# Altium PCB mach in bo chinh STM32F103.PcbDoc
Units mm, origin at the board's own origin, x right, y up, seen from the top; angles counter-clockwise.
Board outline 60.83 x 91.06 mm, 2 copper layers (Top Layer, Bottom Layer); 42 components, 37 nets, 84 pads, 20 vias.
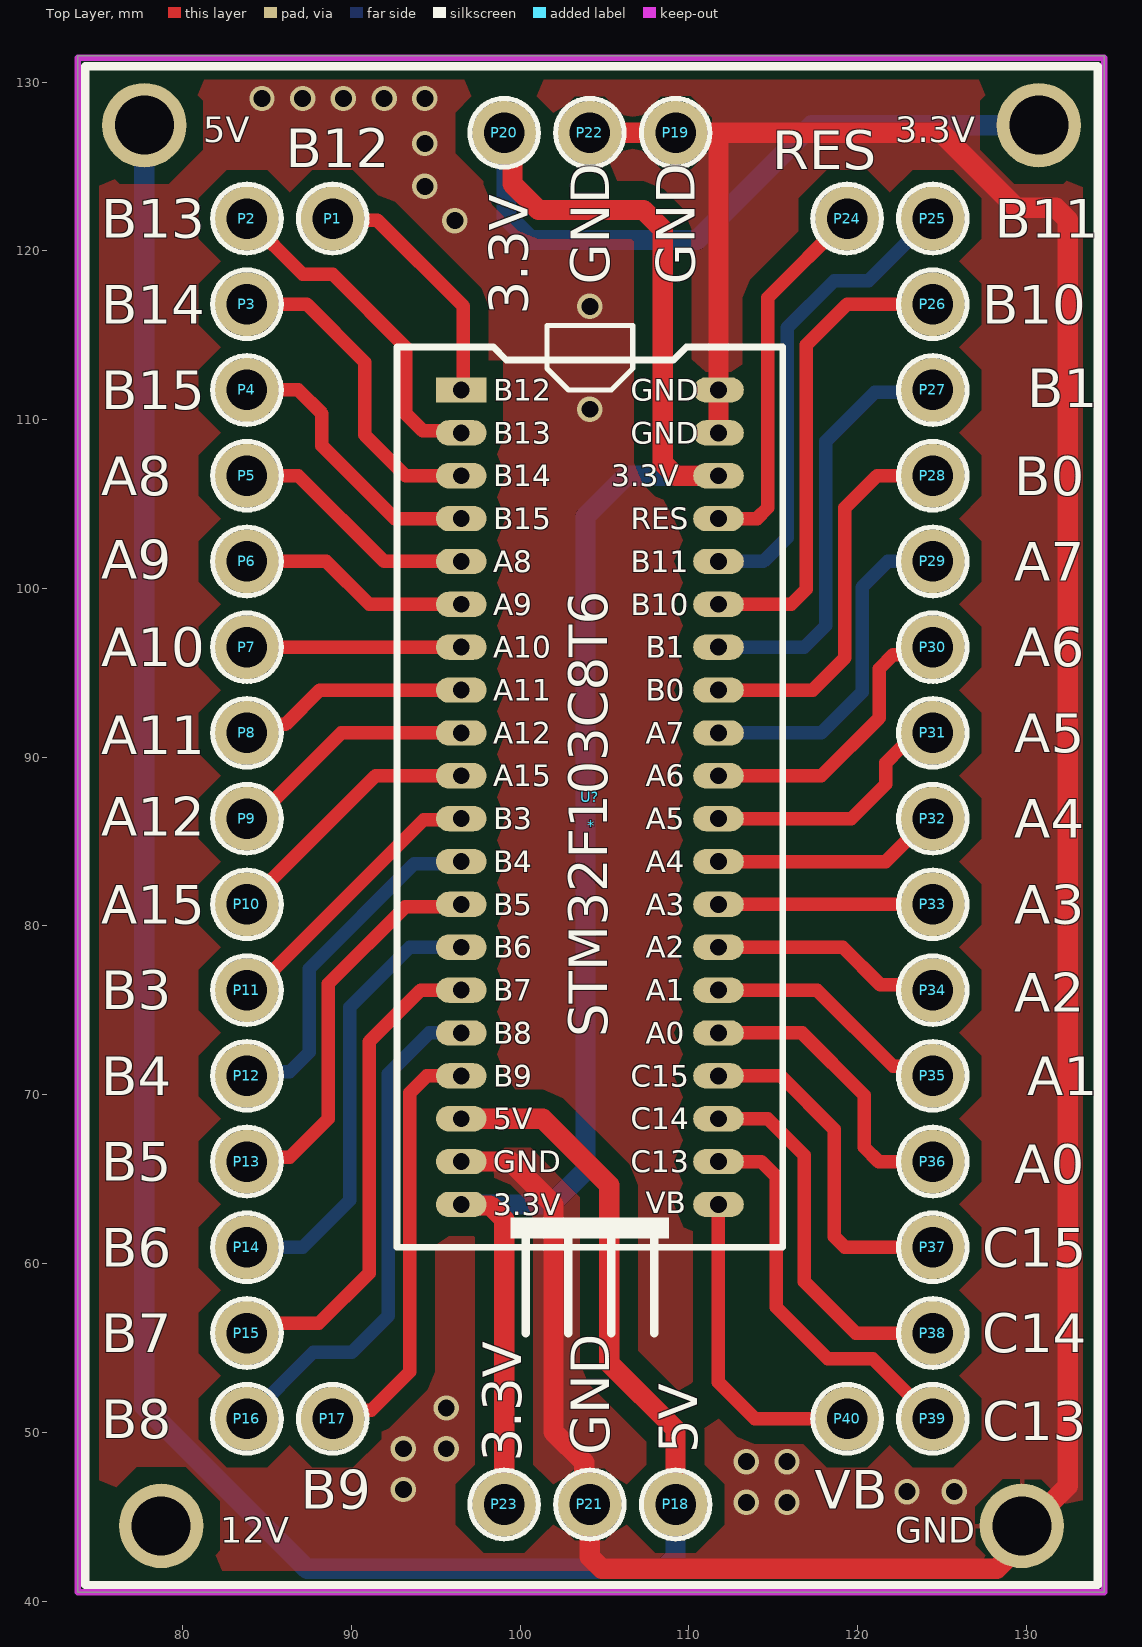
[diagram p0: Top Layer view]
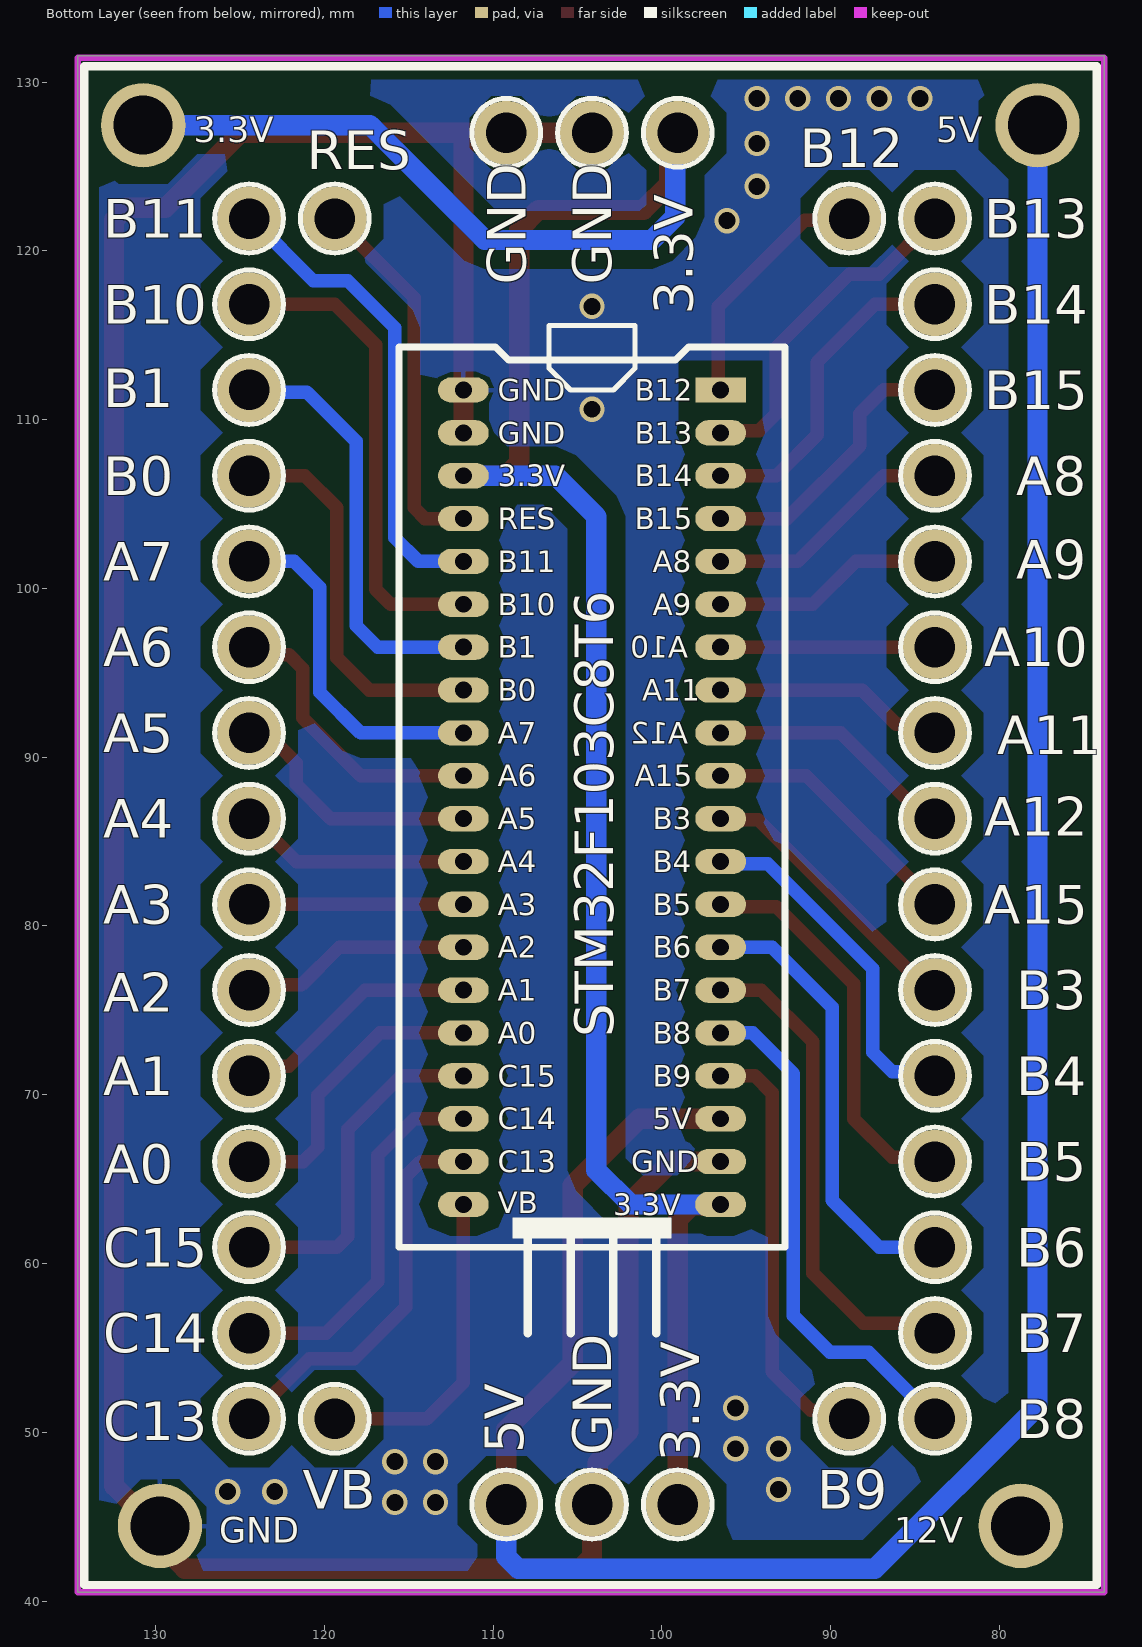
[diagram p1: Bottom Layer view, seen from below]

## Layer stack, top to bottom
Top Solder: solder mask 0.0102, Solder Resist, Dk 3.5
Top Layer: signal copper 0.0356
Dielectric 1: dielectric 0.32, FR-4, Dk 4.8
Bottom Layer: signal copper 0.0356
Bottom Solder: solder mask 0.0102, Solder Resist, Dk 3.5

## Board outline
73.787,40.513 134.62,40.513 134.62,131.572 73.787,131.572

## Design rules (kind name [scope] priority, off if disabled: settings)
Clearance [All] p1: gap=1 ignorepadtopadclearanceinfootprint=FALSE
PolygonConnect [All] p1: connectstyle=Relief reliefconductorwidth=0.254 reliefentries=4 polygonreliefangle="90 Angle" airgapwidth=0.254
RoutingVias [All] p1: holewidth=0.8 width=1.6 viastyle="Through Hole" minholewidth=0.5 minwidth=1 maxholewidth=1 maxwidth=2
SolderMaskExpansion [All] p1: expansion=0.102 istentingtop=FALSE
Width [All] p1: maxlimit=1.2 minlimit=0.3 preferedwidth=0.8
30 further rules are at their usual default settings.

## Components (designator, comment, footprint, x,y, rotation, side; value= is the part's Value field where it differs from the comment)
* "NGUON_1" NGUON_1 105.02,87.485 r0 top
P1 "PIN" PIN1 88.9,121.92 r0 top
P2 "PIN" PIN1 83.82,121.92 r0 top
P3 "PIN" PIN1 83.82,116.84 r0 top
P4 "PIN" PIN1 83.82,111.76 r0 top
P5 "PIN" PIN1 83.82,106.68 r0 top
P6 "PIN" PIN1 83.82,101.6 r0 top
P7 "PIN" PIN1 83.82,96.52 r0 top
P8 "PIN" PIN1 83.82,91.44 r0 top
P9 "PIN" PIN1 83.82,86.36 r0 top
P10 "PIN" PIN1 83.82,81.28 r0 top
P11 "PIN" PIN1 83.82,76.2 r0 top
P12 "PIN" PIN1 83.82,71.12 r0 top
P13 "PIN" PIN1 83.82,66.04 r0 top
P14 "PIN" PIN1 83.82,60.96 r0 top
P15 "PIN" PIN1 83.82,55.88 r0 top
P16 "PIN" PIN1 83.82,50.8 r0 top
P17 "PIN" PIN1 88.9,50.8 r0 top
P18 "PIN" PIN1 109.22,45.72 r0 top
P19 "PIN" PIN1 109.22,127 r0 top
P20 "PIN" PIN1 99.06,127 r0 top
P21 "PIN" PIN1 104.14,45.72 r0 top
P22 "PIN" PIN1 104.14,127 r0 top
P23 "PIN" PIN1 99.06,45.72 r0 top
P24 "PIN" PIN1 119.38,121.92 r0 top
P25 "PIN" PIN1 124.46,121.92 r0 top
P26 "PIN" PIN1 124.46,116.84 r0 top
P27 "PIN" PIN1 124.46,111.76 r0 top
P28 "PIN" PIN1 124.46,106.68 r0 top
P29 "PIN" PIN1 124.46,101.6 r0 top
P30 "PIN" PIN1 124.46,96.52 r0 top
P31 "PIN" PIN1 124.46,91.44 r0 top
P32 "PIN" PIN1 124.46,86.36 r0 top
P33 "PIN" PIN1 124.46,81.28 r0 top
P34 "PIN" PIN1 124.46,76.2 r0 top
P35 "PIN" PIN1 124.46,71.12 r0 top
P36 "PIN" PIN1 124.46,66.04 r0 top
P37 "PIN" PIN1 124.46,60.96 r0 top
P38 "PIN" PIN1 124.46,55.88 r0 top
P39 "PIN" PIN1 124.46,50.8 r0 top
P40 "PIN" PIN1 119.38,50.8 r0 top
U? "STM32F103" STM32F103_KC 104.394,89.535 r0 top

## Footprints (in the part's own frame and the unit in brackets; to place one, negate y for a bottom-side part, rotate by r counter-clockwise, add the part's x,y. Pads: shape width x height; smd on the part's side, far side on the other; paste and mask are expansions set on the pad)
NGUON_1 [mm]
  round 5 hole 3.5: 1(-27.28,39.965) 2(25.72,39.965) 3(-26.28,-43.035) 4(24.72,-43.035)
  silkscreen extent -30.78,-46.53 29.22,43.47
PIN1 [mm]
  round 3.8 hole 2.4: 1(0,0)
  silkscreen extent -2.03,-2.03 2.03,2.03
STM32F103_KC [mm]
  rect 3x1.5 hole 1: 1(-7.874,22.225)
  oval 3x1.5 hole 1: 2(-7.874,19.685) 3(-7.874,17.145) 4(-7.874,14.605) 5(-7.874,12.065) 6(-7.874,9.525) 7(-7.874,6.985) 8(-7.874,4.445) 9(-7.874,1.905) 10(-7.874,-0.635) 11(-7.874,-3.175) 12(-7.874,-5.715) 13(-7.874,-8.255) 14(-7.874,-10.795) 15(-7.874,-13.335) 16(-7.874,-15.875) 17(-7.874,-18.415) 18(-7.874,-20.955) 19(-7.874,-23.495) 20(-7.874,-26.035) 21(7.366,-26.035) 22(7.366,-23.495) 23(7.366,-20.955) 24(7.366,-18.415) 25(7.366,-15.875) 26(7.366,-13.335) 27(7.366,-10.795) 28(7.366,-8.255) 29(7.366,-5.715) 30(7.366,-3.175) 31(7.366,-0.635) 32(7.366,1.905) 33(7.366,4.445) 34(7.366,6.985) 35(7.366,9.525) 36(7.366,12.065) 37(7.366,14.605) 38(7.366,17.145) 39(7.366,19.685) 40(7.366,22.225)
  silkscreen extent -11.68,-33.66 11.18,26.04

## Via types
v1: diameter 1.5, hole 1, Top Layer to Bottom Layer, tented both sides, 20 vias

## Nets (pads, with @x,y where several pads share a name; then routed paths per layer and width w, separated by ;. In a path a pad name is that pad's centre, name@x,y a point inside that pad or via, vN(x,y) a via of type N, cw(c..) or ccw(c..) an arc to the next point about the centre after c; other vN are vias at no path point)
3.3V: *.2 P20.1 P23.1 U?.20 U?.38 | length 146.3
  Top Layer w1.2: U?.20 96.577,63.443 98.228,63.443 99.06,62.611 P23.1 ; P20.1 99.557,126.503 99.557,123.963 101.092,122.428 107.315,122.428 108.458,121.285 108.458,107.442 109.22,106.68 U?.38
  Bottom Layer w1.2: U?.20 101.854,63.5 103.886,65.532 103.886,104.267 106.299,106.68 U?.38 ; P20.1 99.204,126.856 99.204,122.03 100.584,120.65 110.49,120.65 117.29,127.45 *.2
5V: *.1 P18.1 U?.18 | length 145.7
  Top Layer w1.2: U?.18 101.346,68.58 105.283,64.643 105.283,54.102 109.22,50.165 P18.1
  Bottom Layer w1.2: *.1 77.74,51.546 87.376,41.91 108.517,41.91 109.22,42.613 P18.1
A0: P36.1 U?.25 | length 17.7
  Top Layer w0.8: U?.25 116.713,73.66 120.396,69.977 120.396,66.89 121.246,66.04 P36.1
A1: P35.1 U?.26 | length 14.8
  Top Layer w0.8: U?.26 117.602,76.2 122.108,71.694 123.886,71.694 P35.1
A2: P34.1 U?.27 | length 13.8
  Top Layer w0.8: U?.27 119.126,78.74 121.36,76.506 124.154,76.506 P34.1
A3: P33.1 U?.28 | length 12.7
  Top Layer w0.8: U?.28 P33.1
A4: P32.1 U?.29 | length 13.8
  Top Layer w0.8: U?.29 121.666,83.82 124.206,86.36 P32.1
A5: P31.1 U?.30 | length 15.5
  Top Layer w0.8: U?.30 119.634,86.36 121.666,88.392 121.666,89.662 122.56,90.556 122.764,90.556 123.648,91.44 P31.1
A6: P30.1 U?.31 | length 17.6
  Top Layer w0.8: U?.31 117.856,88.9 121.285,92.329 121.285,95.25 122.115,96.08 124.02,96.08 P30.1
A7: P29.1 U?.32 | length 20.6
  Bottom Layer w0.8: U?.32 117.856,91.44 120.269,93.853 120.269,100.076 121.793,101.6 P29.1
A8: P5.1 U?.5 | length 14.8
  Top Layer w0.8: P5.1 86.868,106.68 91.948,101.6 U?.5
A9: P6.1 U?.6 | length 13.8
  Top Layer w0.8: P6.1 88.519,101.6 91.059,99.06 U?.6
A10: P7.1 U?.7 | length 12.7
  Top Layer w0.8: P7.1 U?.7
A11: P8.1 U?.8 | length 13.8
  Top Layer w0.8: P8.1 84.323,91.943 86.101,91.943 88.138,93.98 U?.8
A12: P9.1 U?.9 | length 14.8
  Top Layer w0.8: P9.1 84.328,86.36 89.408,91.44 U?.9
A15: P10.1 U?.10 | length 15.9
  Top Layer w0.8: P10.1 91.44,88.9 U?.10
B0: P28.1 U?.33 | length 23.2
  Top Layer w0.8: U?.33 117.348,93.98 119.253,95.885 119.253,104.775 121.158,106.68 P28.1
B1: P27.1 U?.34 | length 25.4
  Bottom Layer w0.8: U?.34 116.84,96.52 118.11,97.79 118.11,108.712 121.031,111.633 124.333,111.633 P27.1
B3: P11.1 U?.11 | length 16.9
  Top Layer w0.8: P11.1 84.201,76.2 94.296,86.295 96.455,86.295 U?.11
B4: P12.1 U?.12 | length 21.5
  Top Layer w0.8: P12.1 P12.1@84.455,71.12 ; U?.12@96.386,83.686 U?.12
  Bottom Layer w0.8: P12.1 84.069,71.369 86.355,71.369 87.503,72.517 87.503,77.47 93.719,83.686 U?.12@96.386,83.686
B5: P13.1 U?.13 | length 23.7
  Top Layer w0.8: P13.1 84.069,66.289 86.355,66.289 88.646,68.58 88.646,76.581 93.211,81.146 96.386,81.146 U?.13
B6: P14.1 U?.14 | length 26.8
  Bottom Layer w0.8: P14.1 87.122,60.96 89.916,63.754 89.916,75.184 93.472,78.74 U?.14
B7: P15.1 U?.15 | length 29.2
  Top Layer w0.8: P15.1 84.394,56.454 88.077,56.454 91.059,59.436 91.059,73.152 94.107,76.2 U?.15
B8: P16.1 U?.16 | length 31.3
  Top Layer w0.8: U?.16@95.77,73.66 U?.16
  Bottom Layer w0.8: P16.1 87.757,54.737 90.043,54.737 92.202,56.896 92.202,71.247 94.614,73.659 96.519,73.659 U?.16
B9: P17.1 U?.17 | length 25.7
  Top Layer w0.8: P17.1 89.403,51.303 91.181,51.303 93.472,53.594 93.472,70.104 94.487,71.119 96.519,71.119 U?.17
B10: P26.1 U?.35 | length 28.5
  Top Layer w0.8: U?.35 116.078,99.06 116.967,99.949 116.967,114.427 119.38,116.84 P26.1
B11: P25.1 U?.36 | length 28.4
  Bottom Layer w0.8: U?.36 114.427,101.6 115.824,102.997 115.824,115.443 118.618,118.237 120.65,118.237 124.333,121.92 P25.1
B12: P1.1 U?.1 | length 14.9
  Top Layer w0.8: P1.1 88.991,121.829 91.531,121.829 96.647,116.713 96.647,111.887 U?.1
B13: P2.1 U?.2 | length 20.3
  Top Layer w0.8: P2.1 87.122,118.618 88.9,118.618 93.218,114.3 93.218,110.363 94.227,109.354 96.386,109.354 U?.2
B14: P3.1 U?.3 | length 19.4
  Top Layer w0.8: P3.1 87.376,116.84 90.805,113.411 90.805,109.093 93.218,106.68 U?.3
B15: P4.1 U?.4 | length 17
  Top Layer w0.8: P4.1 86.868,111.76 88.265,110.363 88.265,108.458 92.583,104.14 U?.4
C13: P39.1 U?.22 | length 23.6
  Top Layer w0.8: U?.22 114.3,66.04 115.189,65.151 115.189,57.404 118.237,54.356 120.904,54.356 P39.1
C14: P38.1 U?.23 | length 22.3
  Top Layer w0.8: U?.23 114.681,68.58 116.84,66.421 116.84,58.928 119.888,55.88 P38.1
C15: P37.1 U?.24 | length 20.6
  Top Layer w0.8: U?.24 115.443,71.12 118.618,67.945 118.618,61.595 119.253,60.96 P37.1
GND: *.4 P19.1 P21.1 P22.1 U?.19 U?.39 U?.40 | length 183.1
  Top Layer w1.2: U?.19 99.441,66.04 101.981,63.5 101.981,50.038 103.803,48.216 103.803,46.057 P21.1 104.14,42.613 104.843,41.91 128.27,41.91 128.27,41.952 129.74,43.422 *.4@129.74,44.713 ; P22.1 P19.1 111.76,127 ; U?.39 U?.40 111.76,127 ; *.4 130.095,44.45 132.461,46.816 132.461,121.852 131.758,122.555 129.413,122.555 124.968,127 111.76,127
  other v1: 113.411,45.847 115.824,45.847 122.936,46.482 125.73,46.482 93.091,46.609 113.411,48.26 115.824,48.26 93.091,49.022 95.631,49.022 95.631,51.435 104.14,110.617 104.14,116.713 96.139,121.793 94.361,123.825 94.361,126.365 84.709,129.032 87.122,129.032 89.535,129.032 91.948,129.032 94.361,129.032
RES: P24.1 U?.37 | length 22.3
  Top Layer w0.8: U?.37 114.046,104.14 114.681,104.775 114.681,117.221 P24.1
VB: P40.1 U?.21 | length 19.1
  Top Layer w0.8: U?.21 111.76,52.959 113.919,50.8 P40.1
pads on no net: *.3

## Polygon pours and split planes (outlines as drawn)
GND on Top Layer "Top Poly" (solid, remove dead copper, pour order 7): 73.787,131.445 134.62,131.445 134.62,40.513 73.787,40.513
GND on Bottom Layer "Bottom Poly" (solid, remove dead copper, pour order 8): 73.787,131.445 134.62,131.445 134.62,40.513 73.787,40.513

## Keep-outs
Keep-Out Layer:
  lines w0.381: 73.787,40.513 73.787,131.445 134.62,131.445 134.62,40.513 73.787,40.513

## Silkscreen, mask and mechanical layers (free items; w line width, h text height)
Top Overlay:
  text "B12" at 86.106,124.968 h2.29
  text "RES" at 114.935,124.841 h2.29
  text "B13" at 75.184,120.777 h2.29
  text "B11" at 128.143,120.777 h2.29
  text "GND" at 105.283,117.983 h2.29 r90
  text "GND" at 110.363,117.983 h2.29 r90
  text "3.3V" at 100.457,116.205 h2.29 r90
  text "B14" at 75.184,115.697 h2.29
  text "B10" at 127.381,115.697 h2.29
  text "B1" at 130.047,110.744 h2.29
  text "B15" at 75.184,110.617 h2.29
  text "A8" at 75.184,105.537 h2.29
  text "B0" at 129.285,105.537 h2.29
  text "A9" at 75.184,100.584 h2.29
  text "A7" at 129.285,100.457 h2.29
  text "A10" at 75.184,95.377 h2.29
  text "A6" at 129.285,95.377 h2.29
  text "A5" at 129.285,90.297 h2.29
  text "A11" at 75.184,90.17 h2.29
  text "A12" at 75.184,85.344 h2.29
  text "A4" at 129.285,85.217 h2.29
  text "A15" at 75.184,80.137 h2.29
  text "A3" at 129.285,80.137 h2.29
  text "B3" at 75.184,75.057 h2.29
  text "A2" at 129.285,74.93 h2.29
  text "STM32F103C8T6" at 105.156,73.406 h2.29 r90
  text "B4" at 75.184,69.977 h2.29
  text "A1" at 130.047,69.977 h2.29
  text "B5" at 75.184,64.897 h2.29
  text "A0" at 129.285,64.77 h2.29
  text "B6" at 75.184,59.817 h2.29
  text "C15" at 127.381,59.817 h2.29
  text "B7" at 75.184,54.737 h2.29
  text "C14" at 127.381,54.737 h2.29
  text "B8" at 75.184,49.657 h2.29
  text "C13" at 127.381,49.53 h2.29
  text "5V" at 110.49,48.768 h2.29 r90
  text "GND" at 105.283,48.641 h2.29 r90
  text "3.3V" at 100.076,48.26 h2.29 r90
  text "B9" at 86.995,45.466 h2.29
  text "VB" at 117.475,45.466 h2.29
Bottom Overlay:
  text "B12" at 91.821,124.968 h2.29
  text "RES" at 121.031,124.841 h2.29
  text "B13" at 80.899,120.777 h2.29
  text "B11" at 133.096,120.777 h2.29
  text "GND" at 102.997,117.983 h2.29 r270
  text "GND" at 108.077,117.983 h2.29 r270
  text "3.3V" at 98.171,116.205 h2.29 r270
  text "B14" at 80.899,115.697 h2.29
  text "B10" at 133.096,115.697 h2.29
  text "B1" at 133.096,110.744 h2.29
  text "B15" at 80.899,110.617 h2.29
  text "A8" at 78.995,105.537 h2.29
  text "B0" at 133.096,105.537 h2.29
  text "A9" at 78.995,100.584 h2.29
  text "A7" at 133.096,100.457 h2.29
  text "A10" at 80.899,95.377 h2.29
  text "A6" at 133.096,95.377 h2.29
  text "A5" at 133.096,90.297 h2.29
  text "A11" at 80.137,90.17 h2.29
  text "A12" at 80.899,85.344 h2.29
  text "A4" at 133.096,85.217 h2.29
  text "A15" at 80.899,80.137 h2.29
  text "A3" at 133.096,80.137 h2.29
  text "B3" at 78.995,75.057 h2.29
  text "A2" at 133.096,74.93 h2.29
  text "STM32F103C8T6" at 102.87,73.406 h2.29 r270
  text "B4" at 78.995,69.977 h2.29
  text "A1" at 133.096,69.977 h2.29
  text "B5" at 78.995,64.897 h2.29
  text "A0" at 133.096,64.77 h2.29
  text "B6" at 78.995,59.817 h2.29
  text "C15" at 133.096,59.817 h2.29
  text "B7" at 78.995,54.737 h2.29
  text "C14" at 133.096,54.737 h2.29
  text "B8" at 78.995,49.657 h2.29
  text "C13" at 133.096,49.53 h2.29
  text "5V" at 108.204,48.768 h2.29 r270
  text "GND" at 102.997,48.641 h2.29 r270
  text "3.3V" at 97.79,48.26 h2.29 r270
  text "B9" at 90.805,45.466 h2.29
  text "VB" at 121.285,45.466 h2.29

## Text inside footprints (layer, text, board x,y; h text height)
*: Bottom Overlay "5V" at 83.74,126.45 h1.52; Bottom Overlay "3.3V" at 127.74,126.45 h1.52; Bottom Overlay "GND" at 126.24,43.45 h1.52; Bottom Overlay "12V" at 86.24,43.45 h1.52; Top Overlay "5V" at 81.24,126.45 h1.52; Top Overlay "3.3V" at 122.24,126.45 h1.52; Top Overlay "GND" at 122.24,43.45 h1.52; Top Overlay "12V" at 82.24,43.45 h1.52
U?: Bottom Overlay "VB" at 109.728,62.992 h1.27; Bottom Overlay "A1" at 109.728,75.565 h1.27; Bottom Overlay "B1" at 109.728,95.885 h1.27; Bottom Overlay "B11" at 109.728,100.965 h1.27; Bottom Overlay "3.3V" at 109.728,106.045 h1.27; Bottom Overlay "GND" at 109.728,108.585 h1.27; Bottom Overlay "B12" at 101.6,111.125 h1.27; Bottom Overlay "B10" at 109.728,98.425 h1.27; Bottom Overlay "A2" at 109.728,78.105 h1.27; Bottom Overlay "A4" at 109.728,83.185 h1.27; Bottom Overlay "A3" at 109.728,80.645 h1.27; Bottom Overlay "C15" at 109.728,70.485 h1.27; Bottom Overlay "A0" at 109.728,73.025 h1.27; Bottom Overlay "RES" at 109.728,103.505 h1.27; Bottom Overlay "GND" at 109.728,111.125 h1.27; Bottom Overlay "A15" at 101.6,88.265 h1.27; Bottom Overlay "B3" at 100.542,85.725 h1.27; Bottom Overlay "B5" at 100.542,80.645 h1.27; Bottom Overlay "5V" at 100.542,67.945 h1.27; Bottom Overlay "B8" at 100.542,73.025 h1.27; Bottom Overlay "B9" at 100.542,70.485 h1.27; Bottom Overlay "B7" at 100.542,75.565 h1.27; Bottom Overlay "B6" at 100.542,78.105 h1.27; Bottom Overlay "A5" at 109.728,85.725 h1.27; Bottom Overlay "B0" at 109.728,93.345 h1.27; Bottom Overlay "A6" at 109.728,88.265 h1.27; Bottom Overlay "A7" at 109.728,90.805 h1.27; Bottom Overlay "C13" at 109.728,65.405 h1.27; Bottom Overlay "C14" at 109.728,67.945 h1.27; Bottom Overlay "GND" at 101.812,65.405 h1.27; Bottom Overlay "3.3V" at 102.87,62.865 h1.27; Bottom Overlay "A8" at 100.542,100.965 h1.27; Bottom Overlay "B15" at 101.6,103.505 h1.27; Bottom Overlay "B14" at 101.6,106.045 h1.27; Bottom Overlay "B13" at 101.6,108.585 h1.27; Bottom Overlay "A11" at 101.177,93.345 h1.27; Bottom Overlay "A10" at 98.426,95.885 h1.27; Bottom Overlay "A9" at 100.542,98.425 h1.27; Bottom Overlay "A12" at 98.426,90.805 h1.27; Bottom Overlay "B4" at 100.542,83.185 h1.27; Top Overlay "A7" at 107.442,90.805 h1.27; Top Overlay "B0" at 107.442,93.345 h1.27; Top Overlay "B1" at 107.442,95.885 h1.27; Top Overlay "A6" at 107.442,88.265 h1.27; Top Overlay "A5" at 107.442,85.725 h1.27; Top Overlay "A2" at 107.442,78.105 h1.27; Top Overlay "A4" at 107.442,83.185 h1.27; Top Overlay "A3" at 107.442,80.645 h1.27; Top Overlay "A1" at 107.442,75.565 h1.27; Top Overlay "A0" at 107.442,73.025 h1.27; Top Overlay "C14" at 106.553,67.945 h1.27; Top Overlay "C13" at 106.553,65.405 h1.27; Top Overlay "3.3V" at 105.41,106.045 h1.27; Top Overlay "B10" at 106.553,98.425 h1.27; Top Overlay "RES" at 106.553,103.505 h1.27; Top Overlay "B11" at 106.553,100.965 h1.27; Top Overlay "GND" at 106.553,111.125 h1.27; Top Overlay "GND" at 106.553,108.585 h1.27; Top Overlay "C15" at 106.553,70.485 h1.27; Top Overlay "B13" at 98.425,108.585 h1.27; Top Overlay "B14" at 98.425,106.045 h1.27; Top Overlay "B15" at 98.425,103.505 h1.27; Top Overlay "A8" at 98.425,100.965 h1.27; Top Overlay "GND" at 98.425,65.405 h1.27; Top Overlay "5V" at 98.425,67.945 h1.27; Top Overlay "B8" at 98.425,73.025 h1.27; Top Overlay "B9" at 98.425,70.485 h1.27; Top Overlay "VB" at 107.442,62.992 h1.27; Top Overlay "3.3V" at 98.425,62.865 h1.27; Top Overlay "B7" at 98.425,75.565 h1.27; Top Overlay "B6" at 98.425,78.105 h1.27; Top Overlay "A15" at 98.425,88.265 h1.27; Top Overlay "B3" at 98.425,85.725 h1.27; Top Overlay "A12" at 98.425,90.805 h1.27; Top Overlay "B4" at 98.425,83.185 h1.27; Top Overlay "B5" at 98.425,80.645 h1.27; Top Overlay "A11" at 98.425,93.345 h1.27; Top Overlay "A10" at 98.425,95.885 h1.27; Top Overlay "A9" at 98.425,98.425 h1.27; Top Overlay "C13" at 106.553,65.405 h1.27; Top Overlay "C14" at 106.553,67.945 h1.27; Top Overlay "C15" at 106.553,70.485 h1.27; Top Overlay "A0" at 107.442,73.025 h1.27; Top Overlay "A1" at 107.442,75.565 h1.27; Top Overlay "A2" at 107.442,78.105 h1.27; Top Overlay "A3" at 107.442,80.645 h1.27; Top Overlay "A4" at 107.442,83.185 h1.27; Top Overlay "RES" at 106.553,103.505 h1.27; Top Overlay "3.3V" at 105.41,106.045 h1.27; Top Overlay "B4" at 98.425,83.185 h1.27; Top Overlay "B5" at 98.425,80.645 h1.27; Top Overlay "A5" at 107.442,85.725 h1.27; Top Overlay "A6" at 107.442,88.265 h1.27; Top Overlay "A7" at 107.442,90.805 h1.27; Top Overlay "B0" at 107.442,93.345 h1.27; Top Overlay "B1" at 107.442,95.885 h1.27; Top Overlay "B10" at 106.553,98.425 h1.27; Top Overlay "B3" at 98.425,85.725 h1.27; Top Overlay "GND" at 98.425,65.405 h1.27; Top Overlay "5V" at 98.425,67.945 h1.27; Top Overlay "B8" at 98.425,73.025 h1.27; Top Overlay "B7" at 98.425,75.565 h1.27; Top Overlay "B6" at 98.425,78.105 h1.27; Top Overlay "B9" at 98.425,70.485 h1.27; Top Overlay "B11" at 106.553,100.965 h1.27; Top Overlay "GND" at 106.553,108.585 h1.27; Top Overlay "GND" at 106.553,111.125 h1.27; Top Overlay "A15" at 98.425,88.265 h1.27; Top Overlay "A12" at 98.425,90.805 h1.27; Top Overlay "A11" at 98.425,93.345 h1.27; Top Overlay "A10" at 98.425,95.885 h1.27; Top Overlay "A9" at 98.425,98.425 h1.27; Top Overlay "A8" at 98.425,100.965 h1.27; Top Overlay "B15" at 98.425,103.505 h1.27; Top Overlay "B14" at 98.425,106.045 h1.27; Top Overlay "B13" at 98.425,108.585 h1.27; Top Overlay "B12" at 98.425,111.125 h1.27; Top Overlay "VB" at 107.442,62.992 h1.27; Top Overlay "3.3V" at 98.425,62.865 h1.27; Top Overlay "B12" at 98.425,111.125 h1.27